# Altium PCB AD9833_drive.PcbDoc (part 2 of 2)
Units mil, origin at the board's own origin, x right, y up, seen from the top; angles counter-clockwise.
Board outline 3920 x 3880 mil, 2 copper layers (Top Layer, Bottom Layer); 63 components, 67 nets, 311 pads, 51 vias.
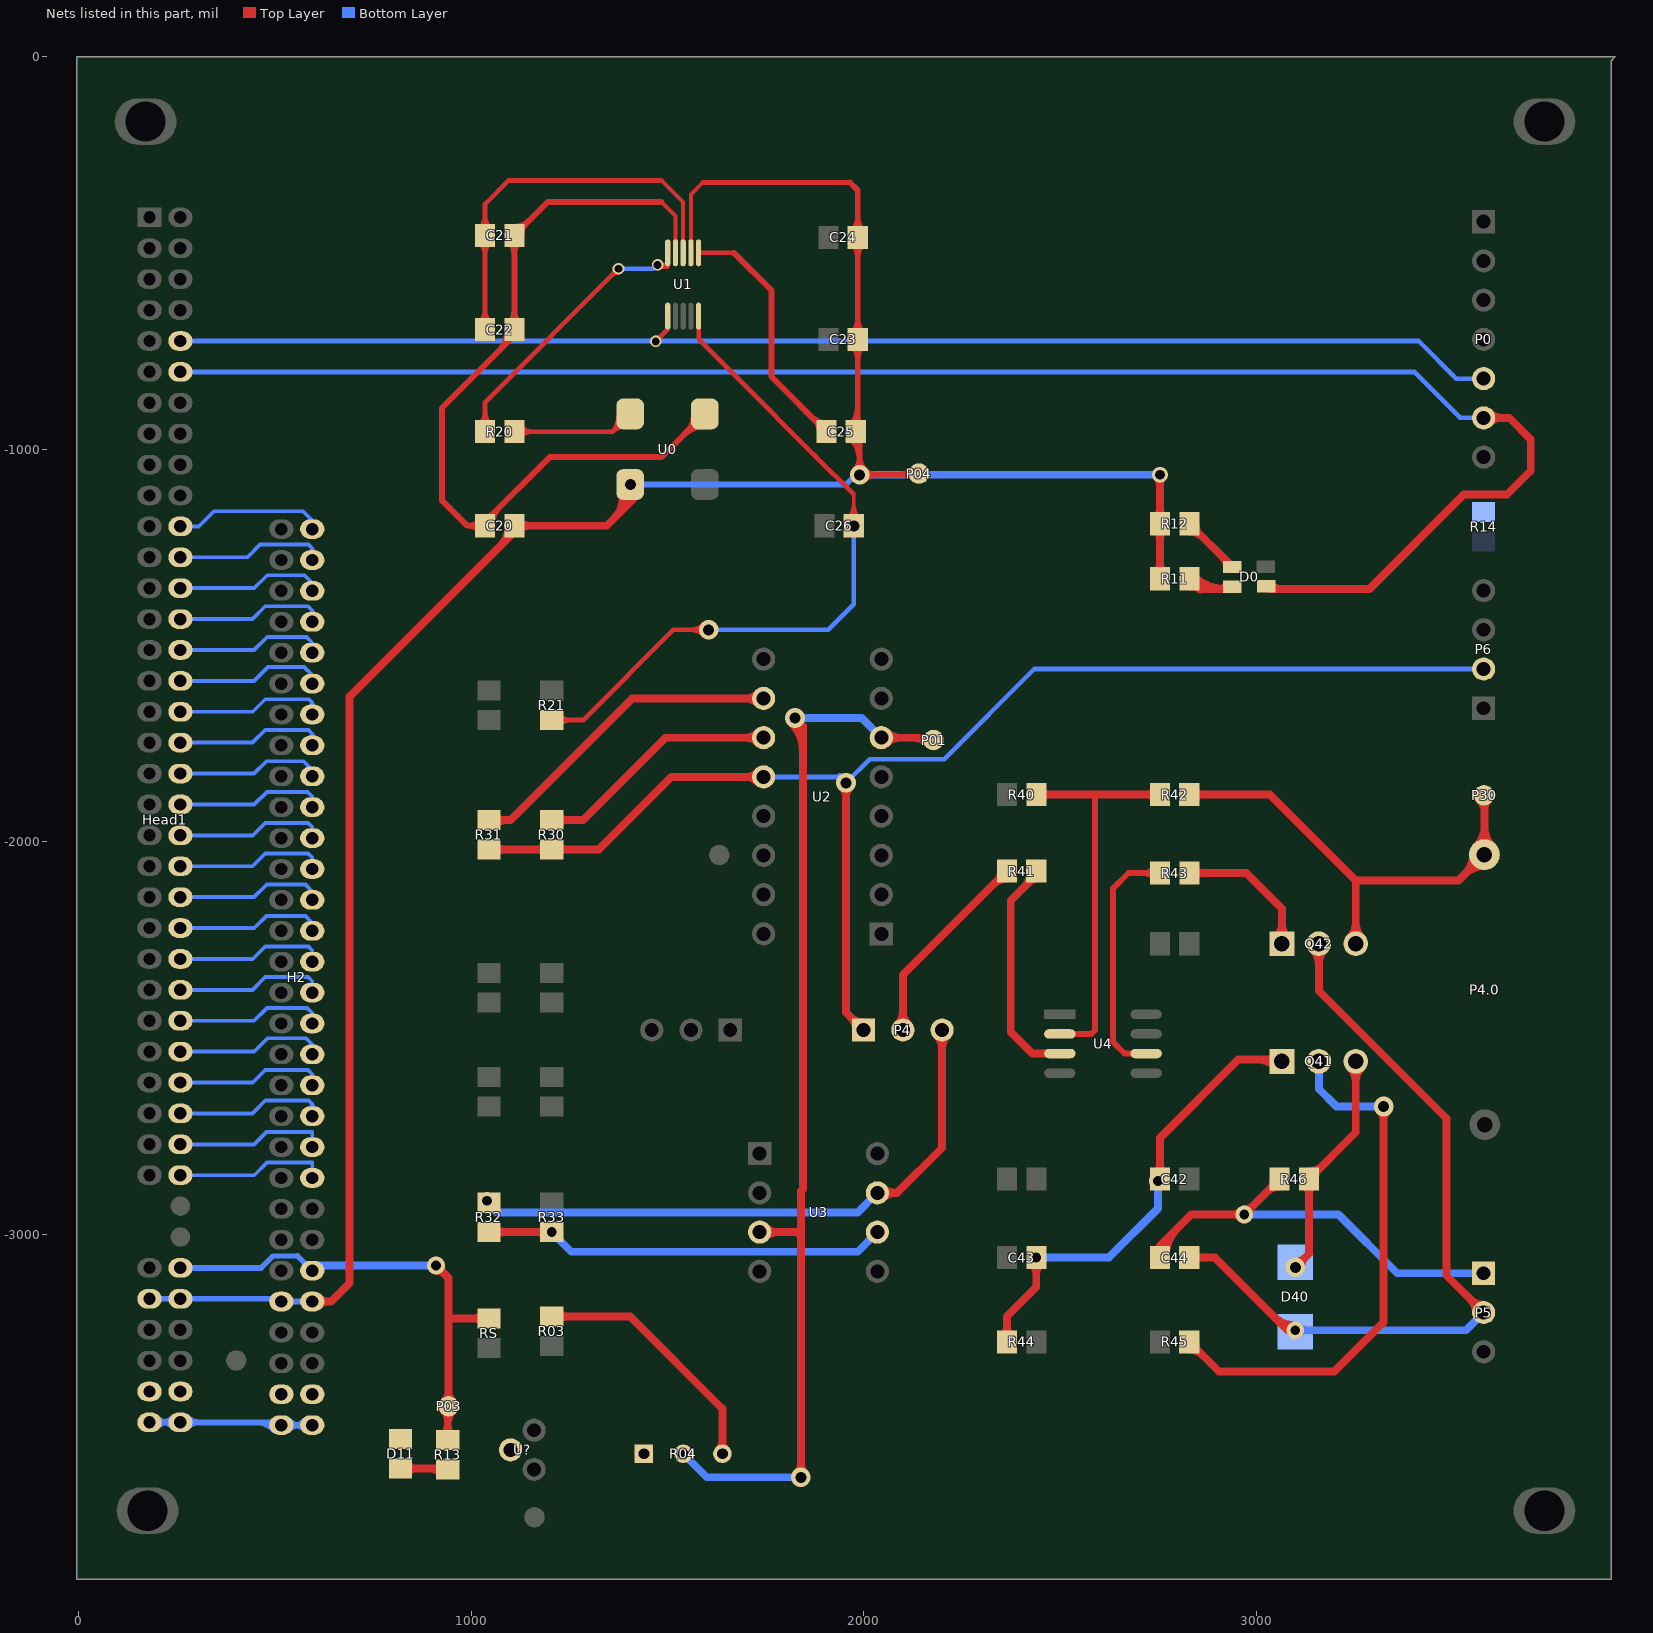
[diagram p2: the nets of this part, all layers, seen from the top]

## Via types
v1: diameter 50, hole 28, Top Layer to Bottom Layer, 18 vias
v2: diameter 45, hole 25, Top Layer to Bottom Layer, 17 vias
v3: diameter 40, hole 25, Top Layer to Bottom Layer, 8 vias
v4: diameter 30, hole 20, Top Layer to Bottom Layer, 6 vias
v5: diameter 35, hole 20, Top Layer to Bottom Layer, 1 vias
v6: diameter 35, hole 25, Top Layer to Bottom Layer, 1 vias

## Nets (pads, with @x,y where several pads share a name; then routed paths per layer and width w, separated by ;. In a path a pad name is that pad's centre, name@x,y a point inside that pad or via, vN(x,y) a via of type N, cw(c..) or ccw(c..) an arc to the next point about the centre after c; other vN are vias at no path point) (continued)
DGND: C20.2 C21.2 C22.2 D11.2 H2.77 H2.78 H2.79 H2.80 Head1.77 Head1.78 Head1.79 Head1.80 R04.1 R14.1 U0.2 U1.4 U?.2 | length 3552.2
  Top Layer w10: 1485,-370 1520.32,-405.32 U1.4@1520.32,-499.29
  Top Layer w15: C20.2@1022.4,-1207.79 ccw(c991.52,-1238.67) 991.52,-1195 ccw(c991.52,-1151.33) C20.2@1022.4,-1182.21 ; C20.2@1035.2,-1172.97 ccw(c1035.2,-1144.41) 1055.39,-1164.61 ; C20.2@1053.29,-1191.06 cw(c1112.07,-1191.06) 1070.5,-1149.5 ; 1070.96,-749.04 ccw(c1020.86,-698.94) C22.2@1091.71,-698.94 ; C22.2@1096.57,-723.43 ccw(c1072.07,-698.94) C22.2@1106.71,-698.94 ; C22.2@1097.01,-678.27 ccw(c1066.13,-647.39) 1109.8,-647.39 ccw(c1153.48,-647.39) C22.2@1122.6,-678.27 ; C21.2@1097.01,-471.73 cw(c1066.13,-502.61) 1109.8,-502.61 cw(c1153.48,-502.61) C21.2@1122.6,-471.73 ; C22.2@1098.14,-721.86 cw(c1109.8,-733.52) C22.2@1109.8,-717.03 ; C21.2@1109.8,-432.97 ccw(c1109.8,-379.79) 1147.41,-417.4 ; C21.2@1127.89,-451.06 cw(c1162.06,-451.06) 1137.9,-426.9 ; 1485,-370 1194.8,-370 C21.2@1109.8,-455 C22.2@1109.8,-695 1109.8,-710.2 925,-895 925,-1130 990,-1195 C20.2@1035.2,-1195 1035.2,-1184.8 1200,-1020 1484.9,-1020 U0.2@1595.09,-909.81 ; 1540.69,-964.22 cw(c1595.09,-1018.62) U0.2@1595.09,-941.68 ; 1550.19,-954.71 ccw(c1509.23,-913.75) U0.2@1567.16,-913.75 ; U0.2@1566.29,-938.61 cw(c1595.09,-967.41) U0.2@1595.09,-926.68
  Bottom Layer w12: Head1.79@180,-3480 Head1.80@258.74,-3480 ; Head1.79@199.34,-3493.44 cw(c231.78,-3525.87) 231.78,-3480 cw(c231.78,-3434.13) Head1.79@199.34,-3466.56 ; Head1.80@239.4,-3493.44 ccw(c206.96,-3525.87) 206.96,-3480 ccw(c206.96,-3434.13) Head1.80@239.4,-3466.56 ; H2.79@509,-3480 H2.79@516,-3487 H2.80@594.74,-3487 ; H2.79@535.34,-3500.44 cw(c567.78,-3532.87) 567.78,-3487 cw(c567.78,-3441.13) H2.79@535.34,-3473.56 ; H2.80@575.4,-3500.44 ccw(c542.96,-3532.87) 542.96,-3487 ccw(c542.96,-3441.13) H2.80@575.4,-3473.56
  Bottom Layer w15: Head1.80@258.74,-3480 H2.79@509,-3480 ; Head1.80@277.02,-3492.37 cw(c306.89,-3522.25) 306.89,-3480 cw(c306.89,-3437.75) Head1.80@277.02,-3467.63 ; 450.95,-3480 cw(c450.95,-3546.15) H2.79@497.72,-3499.37 ; 484.75,-3480 ccw(c484.75,-3461.65) H2.79@497.72,-3474.63 ; H2.77@509,-3401.26 H2.77@516,-3408.26
DRIVER-633OUT: P4.3 R32.2 U3.7 | length 1692
  Top Layer w20: R32.2@1040,-2915.2 v2(1040,-2915) ; U3.7@2035,-2895 2085,-2895 2200,-2780 P4.3@2200,-2480 ; U3.7@2048.81,-2908.81 cw(c2082.14,-2942.14) 2082.14,-2895 cw(c2082.14,-2847.86) U3.7@2048.81,-2881.19 ; P4.3@2186.19,-2493.81 cw(c2152.86,-2527.14) 2200,-2527.14 cw(c2247.14,-2527.14) P4.3@2213.81,-2493.81
  Bottom Layer w20: v2(1040,-2915) 1040,-2920 1065,-2945 1985,-2945 U3.7@2035,-2895
DRIVER-634OUT: P4.1 P6.2 R30.2 R31.1 U2.12 | length 3759
  Top Layer w20: R31.1@1045,-2020 1204.8,-2020 R30.2@1205,-2019.8 1325.2,-2019.8 1510,-1835 U2.12@1745,-1835 ; R31.1@1059.96,-2031.02 cw(c1086.58,-2057.64) 1086.58,-2020 cw(c1086.58,-1982.36) R31.1@1059.96,-2008.98 ; 1162.95,-2020 ccw(c1162.95,-1981.69) R30.2@1190.04,-2008.78 ; 1163.9,-2020 cw(c1163.9,-2056.97) R30.2@1190.04,-2030.83 ; R30.2@1219.96,-2030.83 cw(c1246.58,-2057.44) 1246.58,-2019.8 cw(c1246.58,-1982.17) R30.2@1219.96,-2008.78 ; U2.12@1731.19,-1848.81 ccw(c1697.86,-1882.14) 1697.86,-1835 ccw(c1697.86,-1787.86) U2.12@1731.19,-1821.19 ; v1@1944.39,-1860.61 cw(c1918.79,-1886.21) 1955,-1886.21 cw(c1991.21,-1886.21) v1@1965.61,-1860.61 ; v1@1955,-1860 1955,-2435 P4.1@2000,-2480 ; P4.1@1980.47,-2480 ccw(c1933.33,-2480) 1966.66,-2446.66 ccw(c2000,-2413.33) P4.1@2000,-2460.47
  Bottom Layer w12: U2.12@1745,-1835 v1@1940,-1835 ; v1(1955,-1850) 2015,-1790 2205,-1790 2435,-1560 P6.2@3580,-1560
  Bottom Layer w20: v1@1940,-1835 v1(1955,-1850)
DRIVER-IN: P4.2 R41.1 | length 647.9
  Top Layer w20: P4.2@2086.19,-2466.19 ccw(c2052.86,-2432.86) 2100,-2432.86 ccw(c2147.14,-2432.86) P4.2@2113.81,-2466.19 ; P4.2@2100,-2480 2100,-2340 R41.1@2365,-2075 ; 2331.66,-2108.34 cw(c2365,-2141.67) R41.1@2365,-2094.53 ; R41.1@2341.17,-2098.83 ccw(c2321.28,-2078.94) R41.1@2349.41,-2078.94
DVDD3.3: C20.1 C23.1 C24.1 C25.2 H2.71 H2.72 Head1.71 Head1.72 P04.0 R11.2 R12.2 U0.4 U1.2 | length 7421.2
  Top Layer w10: U0.4@1405.09,-1089.81 v1(1405.28,-1090) ; U1.2@1559.69,-499.29 1559.69,-350.31 1590,-320 ; C25.2@1979.8,-955 C25.2@1990,-965.2
  Top Layer w12: 1590,-320 1965,-320
  Top Layer w15: 1965,-320 1985,-340 C24.1@1985,-460 C23.1@1985,-720 1985,-949.8 C25.2@1979.8,-955 ; C25.2@1967.01,-971.73 cw(c1911.51,-1027.23) 1990,-1027.23 ; C25.2@1967.01,-938.27 ccw(c1923.59,-894.84) 1985,-894.84 ; C23.1@1972.21,-736.73 cw(c1941.33,-767.61) 1985,-767.61 cw(c2028.67,-767.61) C23.1@1997.79,-736.73 ; C23.1@1972.21,-703.27 ccw(c1941.33,-672.39) 1985,-672.39 ccw(c2028.67,-672.39) C23.1@1997.79,-703.27 ; C24.1@1972.21,-476.73 cw(c1941.33,-507.61) 1985,-507.61 cw(c2028.67,-507.61) C24.1@1997.79,-476.73 ; C24.1@1972.21,-443.27 ccw(c1941.33,-412.39) 1985,-412.39 ccw(c2028.67,-412.39) C24.1@1997.79,-443.27 ; C25.2@1977.62,-961.12 cw(c1947.73,-991.01) 1990,-991.01 ; v1@1977.63,-1052.63 ccw(c1947.75,-1022.75) 1990,-1022.75 ccw(c2032.25,-1022.75) 2002.37,-1052.63 ccw(c2032.25,-1022.75) 2032.25,-1065 ccw(c2032.25,-1107.25) v1@2002.37,-1077.37 ; 1985,-919.93 ccw(c2010.93,-919.93) C25.2@1992.6,-938.27 ; C25.2@1990,-965.2 v1(1990,-1065) 2138,-1065 P04.0@2141,-1062 ; 2088.94,-1065 ccw(c2088.94,-1009.94) P04.0@2127.87,-1048.87 ; 2103.43,-1065 cw(c2103.43,-1099.57) P04.0@2127.87,-1075.13
  Top Layer w20: H2.72@594.74,-3172.04 642.96,-3172.04 690,-3125 690,-1630 1110,-1210 C20.1@1110,-1195 1345,-1195 1405.09,-1134.91 ; H2.72@611.25,-3182.64 cw(c636.86,-3208.25) 636.86,-3172.04 cw(c636.86,-3135.82) H2.72@611.25,-3161.43 ; 1075.56,-1244.44 ccw(c1030.06,-1198.94) C20.1@1094.41,-1198.94 ; C20.1@1121.02,-1206.02 cw(c1147.64,-1232.64) 1147.64,-1195 cw(c1147.64,-1157.36) C20.1@1121.02,-1183.98 ; 1365.58,-1174.42 ccw(c1317.46,-1126.3) U0.4@1381.25,-1102.6 ; 1387.62,-1152.38 ccw(c1349.6,-1114.36) U0.4@1400,-1095.64 ; U0.4@1393.72,-1116.49 cw(c1384.51,-1134.9) 1405.09,-1134.9 ; U0.4@1394.68,-1100.61 cw(c1369.53,-1125.75) U0.4@1405.09,-1125.75 ; U0.4@1405.09,-1126.67 cw(c1441.96,-1126.67) U0.4@1415.89,-1100.61 ; U0.4@1405.09,-1089.81 1405.09,-1134.91 ; 1409.66,-1130.34 ccw(c1381.74,-1102.42) U0.4@1418.75,-1088.67 ; U0.4@1416.47,-1116.49 ccw(c1425.68,-1134.9) 1405.09,-1134.9 ; R11.2@2744.17,-1315.04 ccw(c2717.56,-1288.42) 2755.2,-1288.42 ccw(c2792.83,-1288.42) R11.2@2766.22,-1315.04 ; R12.2@2744.17,-1204.96 cw(c2717.56,-1231.58) 2755.2,-1231.58 cw(c2792.83,-1231.58) R12.2@2766.22,-1204.96 ; R12.2@2744.17,-1175.04 ccw(c2717.56,-1148.42) 2755.2,-1148.42 ccw(c2792.83,-1148.42) R12.2@2766.22,-1175.04 ; v3@2747.93,-1072.07 cw(c2730.38,-1089.62) 2755.2,-1089.62 ; v3(2755,-1065) 2755.2,-1065.2 R12.2@2755.2,-1190 R11.2@2755.2,-1330 ; 2755.2,-1088.67 cw(c2778.67,-1088.67) v3@2762.07,-1072.07
  Bottom Layer w10: v1@1985,-1060 v1(1990,-1065)
  Bottom Layer w15: Head1.71@180,-3165.04 Head1.72@258.74,-3165.04 509,-3165.04 H2.71@516,-3172.04 H2.72@594.74,-3172.04 ; v1@1405.09,-1089.81 1954.81,-1089.81 ; 1955,-1090 v1@1985,-1060
  Bottom Layer w20: v1(1990,-1065) 2750,-1065 v3@2755,-1060
MCLK: R20.2 U1.5 | length 824.4
  Top Layer w12: R20.2@1021.34,-937.21 ccw(c987.9,-903.77) 1035.2,-903.77 ccw(c1082.49,-903.77) R20.2@1049.05,-937.21 ; R20.2@1035.2,-955 1035.2,-879.8 v4(1375,-540) ; v4@1366,-540 cw(c1344.27,-540) 1359.64,-555.36 cw(c1375,-570.73) v4@1375,-549 ; v4(1475,-530) v4@1480,-535 ; v4@1482.67,-525.3 ccw(c1500,-514.68) 1500,-535 v4@1480,-535 ; U1.5@1500.14,-526.56 cw(c1480,-506.76) v4@1480,-535
  Bottom Layer w12: v4(1375,-540) v4@1465,-540
NetC21_1: C21.1 C22.1 U1.3 | length 1224.8
  Top Layer w10: 1485,-315 1540,-370 U1.3@1540,-499.29
  Top Layer w12: C22.1@1021.15,-677.21 ccw(c987.7,-643.77) 1035,-643.77 ccw(c1082.3,-643.77) C22.1@1048.85,-677.21 ; C21.1@1021.15,-472.79 cw(c987.7,-506.23) 1035,-506.23 cw(c1082.3,-506.23) C21.1@1048.85,-472.79 ; C21.1@1021.15,-437.21 ccw(c987.7,-403.77) 1035,-403.77 ccw(c1082.3,-403.77) C21.1@1048.85,-437.21 ; C22.1@1035,-695 C21.1@1035,-455 1035,-375 1095,-315 1485,-315
NetC25_1: C25.1 U1.1 | length 711.9
  Top Layer w12: U1.1@1579.37,-499.29 1669.29,-499.29
  Top Layer w15: 1669.29,-499.29 1765,-595 1765,-815 C25.1@1905,-955 ; 1867.4,-917.4 ccw(c1905,-879.79) C25.1@1905,-932.97 ; 1876.9,-926.9 cw(c1852.74,-951.06) C25.1@1886.91,-951.06
NetC26_2: C26.2 R21.1 U1.10 | length 2090.4
  Top Layer w10: C26.2@1960.24,-1176.5 ccw(c1925.09,-1141.35) 1974.8,-1141.35 ccw(c2024.51,-1141.35) C26.2@1989.36,-1176.5 ; C26.2@1960.86,-1181.05 ccw(c1927.19,-1147.38) 1974.8,-1147.38 ; C26.2@1974.8,-1195 1974.8,-1114.8 ; 1974.8,-1146.44 ccw(c2023.76,-1146.44) C26.2@1989.14,-1181.05
  Top Layer w12: R21.1@1205,-1690 1285,-1690 1515,-1460 v1(1605,-1460) ; R21.1@1222.79,-1703.85 cw(c1256.23,-1737.3) 1256.23,-1690 cw(c1256.23,-1642.7) R21.1@1222.79,-1676.15 ; U1.10@1579.37,-660.71 1579.37,-719.37 1678.23,-818.23 1875.95,-1015.95 1974.8,-1114.8 ; v1@1591.56,-1473.44 ccw(c1559.13,-1505.87) 1559.13,-1460 ccw(c1559.13,-1414.13) v1@1591.56,-1446.56
  Bottom Layer w12: v1(1605,-1460) 1910,-1460 1975,-1395 v1(1975,-1195.2)
NetC42_1: C42.1 C43.1 Q41.1 R44.2 | length 1529.1
  Top Layer w20: R44.2@2354.17,-3260.04 ccw(c2327.56,-3233.42) 2365.2,-3233.42 ccw(c2402.83,-3233.42) R44.2@2376.22,-3260.04 ; R44.2@2365.2,-3275 2365.2,-3209.8 2440,-3135 v2(2440,-3060) ; C43.1@2428.98,-3074.96 cw(c2402.36,-3101.58) 2440,-3101.58 cw(c2477.64,-3101.58) C43.1@2451.02,-3074.96 ; C43.1@2431.16,-3068.84 cw(c2409.82,-3090.18) 2440,-3090.18 cw(c2470.18,-3090.18) C43.1@2448.84,-3068.84 ; C42.1@2741.16,-2856.16 ccw(c2707.75,-2822.75) 2755,-2822.75 ; C42.1@2743.98,-2845.04 ccw(c2717.36,-2818.42) 2755,-2818.42 ccw(c2792.64,-2818.42) C42.1@2766.02,-2845.04 ; v2(2750,-2865) C42.1@2755,-2860 2755,-2755 2955,-2555 3060.91,-2555 Q41.1@3065.91,-2560 ; 3001.94,-2555 cw(c3001.94,-2623.97) Q41.1@3050.71,-2575.2 ; 3026.08,-2555 ccw(c3026.08,-2520.18) Q41.1@3050.71,-2544.8
  Bottom Layer w20: v2(2440,-3060) 2625,-3060 2750,-2935 v2(2750,-2865)
NetC44_1: C44.1 P5.1 R46.1 | length 1381.7
  Top Layer w20: C44.1@2747.63,-3042.33 ccw(c2741.01,-3030) 2755,-3030 ; C44.1@2750.59,-3056.06 cw(c2802.87,-3056.06) 2765.9,-3019.1 ; C44.1@2755,-3060 2755,-3030 ; C44.1@2762.37,-3042.33 cw(c2768.99,-3030) 2755,-3030 ; C44.1@2770.59,-3056.06 cw(c2871.15,-3056.06) 2800.04,-2984.96 ; v2@2961.16,-2958.84 ccw(c2939.82,-2980.18) 2939.82,-2950 ccw(c2939.82,-2919.82) v2@2961.16,-2941.16 ; v2@2970,-2937.5 ccw(c2970,-2907.32) 2991.34,-2928.66 ccw(c3012.68,-2950) v2@2982.5,-2950 ; 3026.66,-2893.34 cw(c3060,-2926.67) R46.1@3060,-2879.53 ; R46.1@3036.17,-2883.83 ccw(c3016.28,-2863.94) R46.1@3044.41,-2863.94 ; R46.1@3060,-2860 v2(2970,-2950) 2835,-2950 2755,-3030
  Bottom Layer w20: v2(2970,-2950) 3210,-2950 3360,-3100 P5.1@3580,-3100
NetC44_2: C44.2 D40.1 P5.2 Q42.2 | length 2283.2
  Top Layer w20: C44.2@2829.8,-3060 2895,-3060 3080,-3245 v2(3100,-3245) ; C44.2@2840.83,-3071.02 cw(c2867.44,-3097.64) 2867.44,-3060 cw(c2867.44,-3022.36) C44.2@2840.83,-3048.98 ; 3044.52,-3209.52 ccw(c3100,-3154.04) v2@3100,-3232.5 ; Q42.2@3144.8,-2275.2 cw(c3108.1,-2311.9) 3160,-2311.9 cw(c3211.9,-2311.9) Q42.2@3175.2,-2275.2 ; Q42.2@3160,-2260 3160,-2380 3485,-2705 3485,-3105 P5.2@3580,-3200 ; P5.2@3560.47,-3200 ccw(c3513.33,-3200) 3546.66,-3166.66 ccw(c3580,-3133.33) P5.2@3580,-3180.47
  Bottom Layer w20: v2(3100,-3245) 3535,-3245 P5.2@3580,-3200 ; D40.1@3108.84,-3253.84 cw(c3130.18,-3275.18) 3130.18,-3245 cw(c3130.18,-3214.82) D40.1@3108.84,-3236.16
NetD0_A1: D0.A1 R11.1 | length 335.5
  Top Layer w20: R11.1@2826.88,-1337.05 ccw(c2872.62,-1291.32) 2872.62,-1356 ; R11.1@2830,-1330 2856,-1356 D0.A1@2938,-1356 ; R11.1@2832.2,-1349.37 cw(c2836.48,-1379.45) 2857.97,-1357.97 ; R11.1@2841.02,-1322.91 ccw(c2920.9,-1243.03) D0.A1@2920.9,-1356 ; R11.1@2845.59,-1333.94 ccw(c2873.72,-1333.94) R11.1@2853.83,-1353.83 ; 2902.76,-1356 ccw(c2902.76,-1321.64) D0.A1@2927.06,-1345.94
NetD0_A2: D0.A2 R12.1 | length 242
  Top Layer w20: R12.1@2830,-1209.53 cw(c2830,-1256.67) 2863.34,-1223.34 ; R12.1@2830,-1190 2939,-1299 D0.A2@2939,-1300 ; R12.1@2845.59,-1193.94 ccw(c2873.72,-1193.94) R12.1@2853.83,-1213.83 ; 2915.04,-1275.04 cw(c2890.08,-1300) D0.A2@2925.38,-1300
NetD11_1: D11.1 R13.1 | length 239.3
  Top Layer w20: D11.1@820,-3597.4 937.4,-3597.4 R13.1@940,-3600 ; D11.1@834.96,-3608.43 cw(c861.58,-3635.04) 861.58,-3597.4 cw(c861.58,-3559.76) D11.1@834.96,-3586.38 ; 892.15,-3597.4 cw(c892.15,-3643.91) R13.1@925.04,-3611.02 ; 904.7,-3597.4 ccw(c904.7,-3568.63) R13.1@925.04,-3588.98
NetD40_2: D40.2 Q41.3 R46.2 | length 859.1
  Top Layer w20: v1(3100,-3085) 3134.8,-3050.2 R46.2@3134.8,-2860 3254.09,-2740.71 Q41.3@3254.09,-2560 ; v1@3100,-3070 ccw(c3100,-3033.79) 3125.61,-3059.39 ccw(c3151.21,-3085) v1@3115,-3085 ; R46.2@3123.78,-2874.96 cw(c3097.17,-2901.58) 3134.8,-2901.58 cw(c3172.44,-2901.58) R46.2@3145.83,-2874.96 ; R46.2@3134.8,-2840.47 ccw(c3134.8,-2793.33) 3168.14,-2826.66 ; R46.2@3150.39,-2856.06 cw(c3178.53,-2856.06) R46.2@3158.63,-2836.17 ; Q41.3@3238.89,-2575.2 cw(c3202.2,-2611.9) 3254.09,-2611.9 cw(c3305.99,-2611.9) Q41.3@3269.29,-2575.2
  Bottom Layer w20: v1(3100,-3085) D40.2@3100,-3071.42
NetH2_22: H2.22 Head1.22 | length 383.6
  Bottom Layer w10: Head1.22@258.74,-1196.53 305.47,-1196.53 344,-1158 571,-1158 594.74,-1181.74 H2.22@594.74,-1203.53
NetH2_24: H2.24 Head1.24 | length 410.2
  Bottom Layer w10: Head1.24@258.74,-1275.27 429.73,-1275.27 462,-1243 584.74,-1243 594.74,-1253 ; H2.24@587.47,-1263.64 ccw(c583.32,-1253) 594.74,-1253 ; H2.24@594.74,-1282.27 594.74,-1253 ; H2.24@602.01,-1263.64 cw(c606.16,-1253) 594.74,-1253
NetH2_26: H2.26 Head1.26 | length 378.1
  Bottom Layer w10: Head1.26@258.74,-1354.01 446.99,-1354.01 480,-1321 575,-1321 594.74,-1340.74 H2.26@594.74,-1361.01
NetH2_28: H2.28 Head1.28 | length 409.7
  Bottom Layer w10: Head1.28@258.74,-1432.75 442.25,-1432.75 475,-1400 584,-1400 594.74,-1410.74 ; H2.28@587.63,-1421.06 ccw(c583.7,-1410.74) 594.74,-1410.74 ; H2.28@594.74,-1439.75 594.74,-1410.74 ; H2.28@601.85,-1421.06 cw(c605.78,-1410.74) 594.74,-1410.74
NetH2_30: H2.30 Head1.30 | length 381.6
  Bottom Layer w10: Head1.30@258.74,-1511.49 446.51,-1511.49 480,-1478 579.74,-1478 594.74,-1493 H2.30@594.74,-1518.49
NetH2_32: H2.32 Head1.32 | length 380.7
  Bottom Layer w10: Head1.32@258.74,-1590.23 446.77,-1590.23 482,-1555 574,-1555 594.74,-1575.74 H2.32@594.74,-1597.23
NetH2_34: H2.34 Head1.34 | length 415.6
  Bottom Layer w10: Head1.34@258.74,-1668.97 443.03,-1668.97 475,-1637 586.74,-1637 594.74,-1645 ; H2.34@586.51,-1657.75 ccw(c580.76,-1645) 594.74,-1645 ; H2.34@594.74,-1675.97 594.74,-1645 ; H2.34@602.97,-1657.75 cw(c608.72,-1645) 594.74,-1645
NetH2_36: H2.36 Head1.36 | length 412
  Bottom Layer w10: Head1.36@258.74,-1747.71 442.29,-1747.71 475,-1715 584.74,-1715 594.74,-1725 ; H2.36@587.21,-1736.18 ccw(c582.67,-1725) 594.74,-1725 ; H2.36@594.74,-1754.71 594.74,-1725 ; H2.36@602.27,-1736.18 cw(c606.81,-1725) 594.74,-1725
NetH2_38: H2.38 Head1.38 | length 374.2
  Bottom Layer w10: Head1.38@258.74,-1826.46 446.54,-1826.46 478,-1795 572,-1795 594.74,-1817.74 H2.38@594.74,-1833.46
NetH2_40: H2.40 Head1.40 | length 381.5
  Bottom Layer w10: Head1.40@258.74,-1905.2 446.8,-1905.2 479,-1873 582.74,-1873 594.74,-1885 H2.40@594.74,-1912.2
NetH2_42: H2.42 Head1.42 | length 381.9
  Bottom Layer w10: Head1.42@258.74,-1983.94 443.06,-1983.94 475,-1952 584,-1952 594.74,-1962.74 H2.42@594.74,-1990.94
NetH2_44: H2.44 Head1.44 | length 382.9
  Bottom Layer w10: Head1.44@258.74,-2062.68 442.32,-2062.68 475,-2030 584,-2030 594.74,-2040.74 H2.44@594.74,-2069.68
NetH2_46: H2.46 Head1.46 | length 378.5
  Bottom Layer w10: Head1.46@258.74,-2141.42 446.58,-2141.42 475,-2113 478.93,-2109 577,-2109 594.74,-2126.74 H2.46@594.74,-2148.42
NetH2_48: H2.48 Head1.48 | length 376.7
  Bottom Layer w10: Head1.48@258.74,-2220.16 446.84,-2220.16 478,-2189 577,-2189 594.74,-2206.74 H2.48@594.74,-2227.16
NetH2_50: H2.50 Head1.50 | length 382.2
  Bottom Layer w10: Head1.50@258.74,-2298.9 443.1,-2298.9 475,-2267 584.74,-2267 594.74,-2277 H2.50@594.74,-2305.9
NetH2_52: H2.52 Head1.52 | length 382.9
  Bottom Layer w10: Head1.52@258.74,-2377.64 442.36,-2377.64 475,-2345 584,-2345 594.74,-2355.74 H2.52@594.74,-2384.64
NetH2_54: H2.54 Head1.54 | length 381.2
  Bottom Layer w10: Head1.54@258.74,-2456.38 446.62,-2456.38 479,-2424 581.74,-2424 594.74,-2437 H2.54@594.74,-2463.38
NetH2_56: H2.56 Head1.56 | length 381.9
  Bottom Layer w10: Head1.56@258.74,-2535.12 446.88,-2535.12 481,-2501 578.74,-2501 594.74,-2517 H2.56@594.74,-2542.12
NetH2_58: H2.58 Head1.58 | length 381.8
  Bottom Layer w10: Head1.58@258.74,-2613.86 443.14,-2613.86 475,-2582 584,-2582 594.74,-2592.74 H2.58@594.74,-2620.86
NetH2_60: H2.60 Head1.60 | length 414.9
  Bottom Layer w10: Head1.60@258.74,-2692.6 442.4,-2692.6 475,-2660 585.74,-2660 594.74,-2669 ; H2.60@586.71,-2681.28 ccw(c581.34,-2669) 594.74,-2669 ; H2.60@594.74,-2699.6 594.74,-2669 ; H2.60@602.77,-2681.28 cw(c608.14,-2669) 594.74,-2669
NetH2_62: H2.62 Head1.62 | length 387.3
  Bottom Layer w10: Head1.62@258.74,-2771.34 446.66,-2771.34 478,-2740 594.74,-2740 H2.62@594.74,-2778.34
NetH2_64: H2.64 Head1.64 | length 388.4
  Bottom Layer w10: Head1.64@258.74,-2850.08 446.92,-2850.08 479,-2818 594.74,-2818 H2.64@594.74,-2857.08
NetP4.0_1: P4.0.1 P30.0 Q42.3 R42.2 | length 1607
  Top Layer w20: R42.2@2829.8,-1880 3035,-1880 3254.09,-2099.09 ; R42.2@2840.83,-1891.02 cw(c2867.44,-1917.64) 2867.44,-1880 cw(c2867.44,-1842.36) R42.2@2840.83,-1868.98 ; Q42.3@3238.89,-2244.8 ccw(c3202.2,-2208.1) 3254.09,-2208.1 ccw(c3305.99,-2208.1) Q42.3@3269.29,-2244.8 ; Q42.3@3254.09,-2260 3254.09,-2099.09 ; P4.0.1@3552.63,-2033 cw(c3481.72,-2033) 3531.86,-2083.14 cw(c3582,-2133.28) P4.0.1@3582,-2062.37 ; P4.0.1@3561.23,-2012.23 ccw(c3511.09,-1962.09) 3582,-1962.09 ccw(c3652.91,-1962.09) P4.0.1@3602.77,-2012.23 ; P30.0@3569.64,-1893.36 cw(c3539.81,-1923.19) 3582,-1923.19 ; P30.0@3581,-1882 3582,-1883 P4.0.1@3582,-2033 3515.91,-2099.09 3254.09,-2099.09 ; 3582,-1918.37 cw(c3617.37,-1918.37) P30.0@3592.36,-1893.36
NetQ41_2: Q41.2 R45.2 | length 1497.7
  Top Layer w20: R45.2@2829.8,-3294.53 cw(c2829.8,-3341.67) 2863.14,-3308.34 ; R45.2@2829.8,-3275 2904.8,-3350 3200,-3350 3325,-3225 v1(3325,-2675) ; R45.2@2845.39,-3278.94 ccw(c2873.53,-3278.94) R45.2@2853.63,-3298.83 ; v1@3314.39,-2685.61 cw(c3288.79,-2711.21) 3325,-2711.21 cw(c3361.21,-2711.21) v1@3335.61,-2685.61
  Bottom Layer w20: Q41.2@3160,-2560 3160,-2630 3205,-2675 v1(3325,-2675)
NetQ42_1: Q42.1 R43.1 | length 503.3
  Top Layer w20: R43.1@2830,-2080 2975,-2080 3065.91,-2170.91 Q42.1@3065.91,-2260 ; R43.1@2841.02,-2091.02 cw(c2867.64,-2117.64) 2867.64,-2080 cw(c2867.64,-2042.36) R43.1@2841.02,-2068.98 ; Q42.1@3050.71,-2244.8 ccw(c3014.01,-2208.1) 3065.91,-2208.1 ccw(c3117.8,-2208.1) Q42.1@3081.11,-2244.8
NetR03_1: R03.1 R04.3 | length 758.1
  Top Layer w20: R03.1@1205,-3210 1405,-3210 1640,-3445 R04.3@1640,-3560 ; R03.1@1219.96,-3221.02 cw(c1246.58,-3247.64) 1246.58,-3210 cw(c1246.58,-3172.36) R03.1@1219.96,-3198.98 ; R04.3@1630.37,-3550.37 ccw(c1607.11,-3527.11) 1640,-3527.11 ccw(c1672.89,-3527.11) R04.3@1649.63,-3550.37
NetR20_1: R20.1 U0.3 | length 513
  Top Layer w12: R20.1@1110,-955 1359.9,-955 U0.3@1405.09,-909.81 ; R20.1@1123.85,-968.85 cw(c1157.3,-1002.3) 1157.3,-955 cw(c1157.3,-907.7) R20.1@1123.85,-941.15 ; U0.3@1374.77,-940.13 cw(c1397.71,-963.08) U0.3@1402.51,-930.99 ; U0.3@1375.66,-913.89 cw(c1315.15,-914.18) 1357.94,-956.97 cw(c1393.33,-992.36) U0.3@1400.74,-942.86
NetR30_1: R30.1 U2.11 | length 760.2
  Top Layer w20: R30.1@1205,-1945 1285,-1945 1495,-1735 U2.11@1745,-1735 ; R30.1@1219.96,-1956.02 cw(c1246.58,-1982.64) 1246.58,-1945 cw(c1246.58,-1907.36) R30.1@1219.96,-1933.98 ; U2.11@1731.19,-1748.81 ccw(c1697.86,-1782.14) 1697.86,-1735 ccw(c1697.86,-1687.86) U2.11@1731.19,-1721.19
NetR31_2: R31.2 U2.10 | length 961.7
  Top Layer w20: R31.2@1045,-1945.2 1099.8,-1945.2 1410,-1635 U2.10@1745,-1635 ; R31.2@1059.96,-1956.22 cw(c1086.58,-1982.83) 1086.58,-1945.2 cw(c1086.58,-1907.56) R31.2@1059.96,-1934.17 ; U2.10@1731.19,-1648.81 ccw(c1697.86,-1682.14) 1697.86,-1635 ccw(c1697.86,-1587.86) U2.10@1731.19,-1621.19
NetR32_1: R32.1 R33.1 U3.6 | length 1244.2
  Top Layer w20: R32.1@1045,-2995 1175,-2995 ; R32.1@1059.96,-3006.02 cw(c1086.58,-3032.64) 1086.58,-2995 cw(c1086.58,-2957.36) R32.1@1059.96,-2983.98 ; R33.1@1187.33,-3002.37 ccw(c1175,-3008.99) 1175,-2995 ; R33.1@1187.33,-2987.63 cw(c1175,-2981.01) 1175,-2995 ; R33.1@1190.04,-3006.02 ccw(c1163.42,-3032.64) 1163.42,-2995 ccw(c1163.42,-2957.36) R33.1@1190.04,-2983.98 ; R33.1@1196.12,-3003.8 ccw(c1175,-3024.75) 1175,-2995 ; R33.1@1196.12,-2986.2 cw(c1175,-2965.25) 1175,-2995 ; R33.1@1196.16,-3003.84 ccw(c1174.82,-3025.18) 1174.82,-2995 ccw(c1174.82,-2964.82) R33.1@1196.16,-2986.16
  Bottom Layer w20: v2(1205,-2995) 1255,-3045 1985,-3045 U3.6@2035,-2995
NetR40_1: R40.1 R42.1 U4.2 | length 1127.4
  Top Layer w15: U4.2@2500,-2490 2580,-2490 2590,-2480 2590,-1880
  Top Layer w20: R40.1@2440,-1880 R42.1@2755,-1880 ; R40.1@2451.02,-1891.02 cw(c2477.64,-1917.64) 2477.64,-1880 cw(c2477.64,-1842.36) R40.1@2451.02,-1868.98 ; R42.1@2743.98,-1891.02 ccw(c2717.36,-1917.64) 2717.36,-1880 ccw(c2717.36,-1842.36) R42.1@2743.98,-1868.98
NetR41_2: R41.2 U4.3 | length 643.7
  Top Layer w20: 2408.76,-2116.24 ccw(c2371.46,-2078.94) R41.2@2424.21,-2078.94 ; R41.2@2423.87,-2101.13 cw(c2439.8,-2117.06) R41.2@2439.8,-2094.53 ; R41.2@2439.8,-2075 2439.8,-2085.2 2375,-2150 2375,-2485 2430,-2540 U4.3@2500,-2540
NetR43_2: R43.2 U4.6 | length 692.8
  Top Layer w15: U4.6@2720,-2540 2665,-2540 2635,-2510 2635,-2120 2675,-2080 R43.2@2755.2,-2080 ; R43.2@2742.4,-2092.79 ccw(c2711.52,-2123.67) 2711.52,-2080 ccw(c2711.52,-2036.33) R43.2@2742.4,-2067.21
RED_IND: D0.K1 Head1.12 P0.6 | length 4497.9
  Top Layer w20: D0.K1@3026,-1349 3033,-1356 3289,-1356 3530,-1115 3640,-1115 3700,-1055 3700,-975 3645,-920 P0.6@3580,-920 ; D0.K1@3037.94,-1344.94 ccw(c3064.65,-1318.22) 3064.65,-1356 ; P0.6@3593.81,-933.81 cw(c3627.14,-967.14) 3627.14,-920 cw(c3627.14,-872.86) P0.6@3593.81,-906.19
  Bottom Layer w12: Head1.12@258.74,-802.83 3402.83,-802.83 3520,-920 P0.6@3580,-920
SET_OFF: P01.0 R04.2 U2.6 U3.3 | length 3097.9
  Top Layer w20: U3.3@1735,-2995 1830,-2995 1840,-3005 ; U3.3@1748.81,-3008.81 cw(c1782.14,-3042.14) 1782.14,-2995 cw(c1782.14,-2947.86) U3.3@1748.81,-2981.19 ; v1@1814.39,-1695.61 cw(c1740.5,-1769.5) 1845,-1769.5 ; v1@1828.54,-1681.46 cw(c1788.79,-1721.21) 1845,-1721.21 ; v1@1829.39,-3609.39 ccw(c1803.79,-3583.79) 1840,-3583.79 ccw(c1876.21,-3583.79) v1@1850.61,-3609.39 ; v1(1840,-3620) 1840,-3005 ; 1840,-2890 1840,-3005 ; 1845,-2885 1845,-1705 ; U2.6@2045,-1735 2172,-1735 P01.0@2178,-1741 ; U2.6@2058.81,-1748.81 cw(c2092.14,-1782.14) 2092.14,-1735 cw(c2092.14,-1687.86) U2.6@2058.81,-1721.19 ; 2124.74,-1735 cw(c2124.74,-1794.26) P01.0@2166.64,-1752.36
  Bottom Layer w20: R04.2@1540,-3560 1600,-3620 v1(1840,-3620) ; v1(1825,-1685) 1995,-1685 U2.6@2045,-1735
SIMO: Head1.10 P0.5 U1.6 | length 3484.6
  Top Layer w12: v4(1470,-725) 1500.63,-694.37 U1.6@1500.63,-660.71 ; v4@1470,-716 ccw(c1470,-694.27) 1485.36,-709.64 ccw(c1500.73,-725) v4@1479,-725 ; 1495.27,-699.73 ccw(c1484.01,-688.46) U1.6@1499.94,-688.46
  Bottom Layer w12: Head1.10@258.74,-724.09 3414.09,-724.09 3510,-820 P0.5@3580,-820
VDD5.0: H2.70 Head1.70 P03.0 R13.2 RS.2 | length 1536.6
  Top Layer w20: v2@910,-3092.7 cw(c910,-3122.87) 931.34,-3101.53 cw(c952.68,-3080.2) v2@922.5,-3080.2 ; v2(910,-3080.2) 942,-3112.2 942,-3210 ; R13.2@928.98,-3514.17 ccw(c902.36,-3487.56) 940,-3487.56 ccw(c977.64,-3487.56) R13.2@951.02,-3514.17 ; P03.0@930.64,-3450.36 cw(c908.05,-3472.95) 940,-3472.95 ; P03.0@930.64,-3427.64 ccw(c903.22,-3400.22) 942,-3400.22 ccw(c980.78,-3400.22) P03.0@953.36,-3427.64 ; R13.2@940,-3525.2 940,-3441 P03.0@942,-3439 942,-3210 ; 940,-3482.61 cw(c985.61,-3482.61) P03.0@953.36,-3450.36 ; RS.2@1030.04,-3226.22 ccw(c1003.42,-3252.83) 1003.42,-3215.2 ccw(c1003.42,-3177.56) RS.2@1030.04,-3204.17 ; RS.2@1045,-3215.2 947.2,-3215.2 942,-3210
  Bottom Layer w13: 464.06,-3086.3 494.56,-3055.8 557.24,-3055.8
  Bottom Layer w15: Head1.70@258.74,-3086.3 464.06,-3086.3 ; 557.24,-3055.8 H2.70@594.74,-3093.3
  Bottom Layer w20: H2.70@594.74,-3093.3 607.84,-3080.2 v2(910,-3080.2)
pads on no net: H2.21 H2.23 H2.25 H2.27 H2.29 H2.31 H2.33 H2.35 H2.37 H2.39 H2.41 H2.43 H2.45 H2.47 H2.49 H2.51 H2.53 H2.55 H2.57 H2.59 H2.61 H2.63 Head1.1 Head1.3 Head1.5 Head1.7 Head1.9 Head1.11 Head1.13 Head1.15 Head1.16 Head1.17 Head1.18 Head1.19 Head1.20 Head1.21 Head1.23 Head1.25 Head1.27 Head1.29 Head1.31 Head1.33 Head1.35 Head1.37 Head1.39 Head1.41 Head1.43 Head1.45 Head1.47 Head1.49 Head1.51 Head1.53 Head1.55 Head1.57 Head1.59 Head1.61 Head1.63 Head1.65 Head1.67 Head1.69 U0.1 U2.3 U2.4 U2.5 U2.9 U2.13 U2.15 U2.16 U4.1 U4.5 U4.8 U?.3

## Keep-outs
Keep-Out Layer:
  lines w13.94: 0,-3880 3900,-3880 3905,-3880 3905,5 0,5 0,-3875 0,-3880

## Silkscreen, mask and mechanical layers (free items; w line width, h text height)
Top Overlay:
  lines w13.94: 2160,-800 3420,-800 3420,-290 2180,-290 2160,-310 2160,-800
  text "CS1" at 340,-435 h80
  text "CS1" at 3650,-440 h80
  text "AD9833_Drive Board" at 2200,-455 h140
  text "CS2" at 340,-515 h80
  text "CS2" at 3650,-545 h80
  text "CS3" at 340,-600 h80
  text "Designed by Li Yukun" at 2345,-650 h120
  text "CS3" at 3650,-650 h80
  text "CLK" at 340,-675 h80
  text "CLK" at 3650,-745 h80
  text "SIMO" at 340,-750 h80
  text "NEU" at 2345,-780 h120
  text "2015/11/8" at 2900,-785 h120
  text "RED_IND" at 340,-830 h80
  text "SIMO" at 3645,-845 h80
  text "BLUE_IND" at 340,-910 h80
  text "RED" at 3645,-945 h80
  text "BLUE" at 3645,-1050 h80
  text "AGND" at 3645,-1375 h80
  text "AGND" at 3640,-1485 h80
  text "634OUT" at 3640,-1585 h70
  text "9833OUT" at 3630,-1680 h70
  text "AV-12V" at 320,-2940 h40
  text "AV+12V" at 320,-3020 h40
  text "VDD5.0" at 650,-3105 h80
  text "+" at 3690,-3110 h80 r90
  text "VDD3.3" at 651,-3195 h80
  text "-" at 3655,-3210 h80
  text "-15" at 340,-3290 h80
  text "AGND" at 3650,-3320 h60
  text "AV+15" at 656,-3355 h80
  text "Drive Output" at 3310,-3485 h100

## Text inside footprints (layer, text, board x,y; h text height)
Q41: Top Overlay "2" at 3140,-2679.09 h59.06; Top Overlay "3" at 3234.09,-2679.09 h59.06; Top Overlay "1" at 3065.91,-2679.09 h59.06
Q42: Top Overlay "2" at 3140,-2379.09 h59.06; Top Overlay "3" at 3234.09,-2379.09 h59.06; Top Overlay "1" at 3065.91,-2379.09 h59.06
U?: Top Overlay "3" at 1235,-3520 h59.05; Top Overlay "1" at 1245,-3640 h59.05